# Altium PCB Recv.PcbDoc
Units mm, origin at the board's own origin, x right, y up, seen from the top; angles counter-clockwise.
Board outline 44.64 x 20.07 mm, 2 copper layers (Top Layer, Bottom Layer), stack 1.569 mm thick; 47 components, 29 nets, 139 pads, 515 vias.
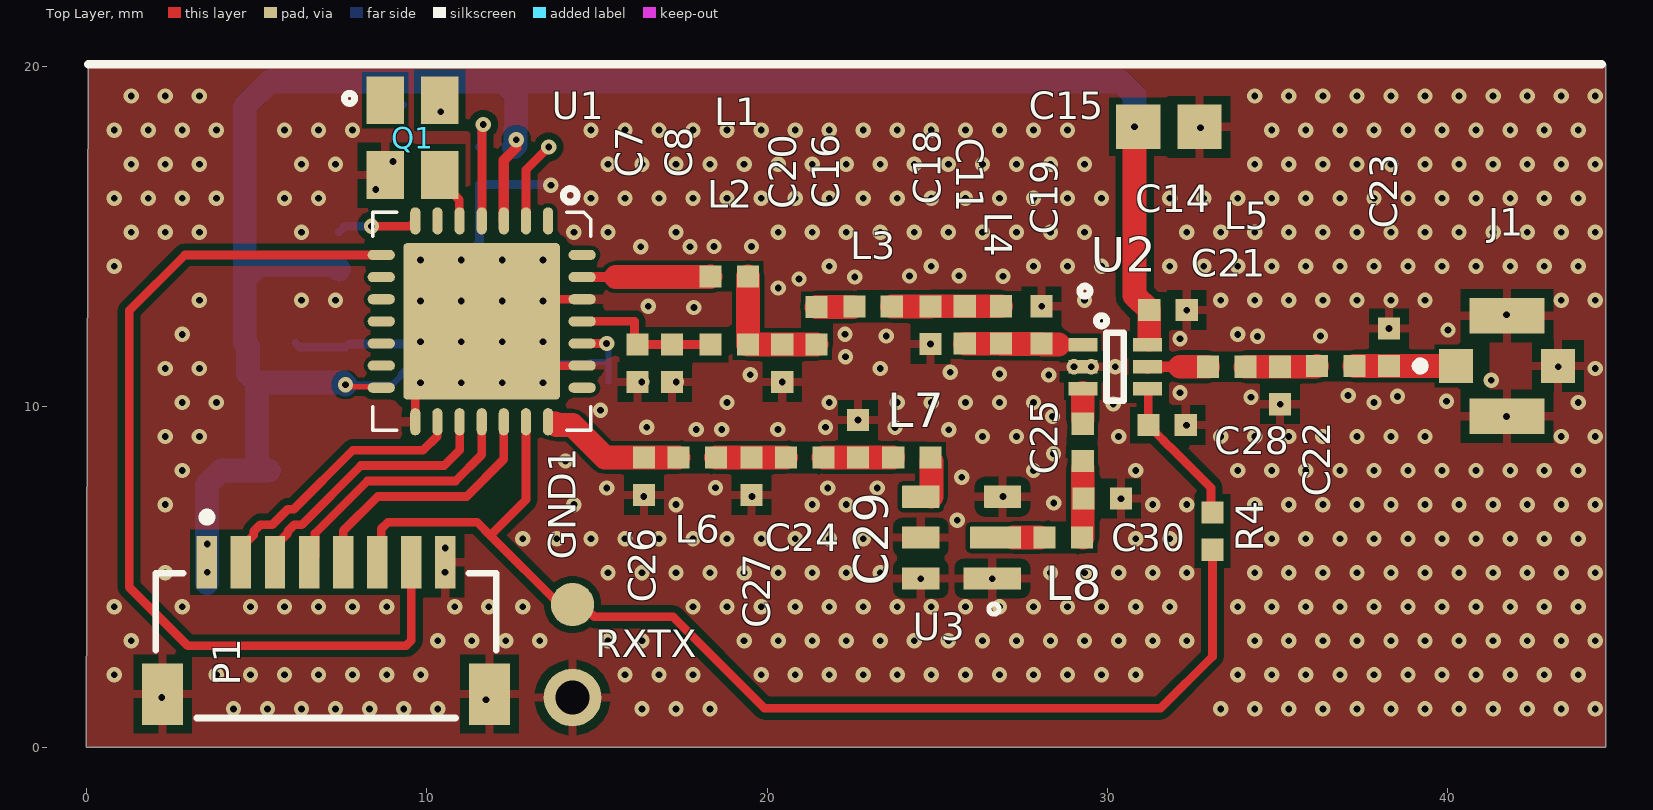
[diagram p0: Top Layer view]
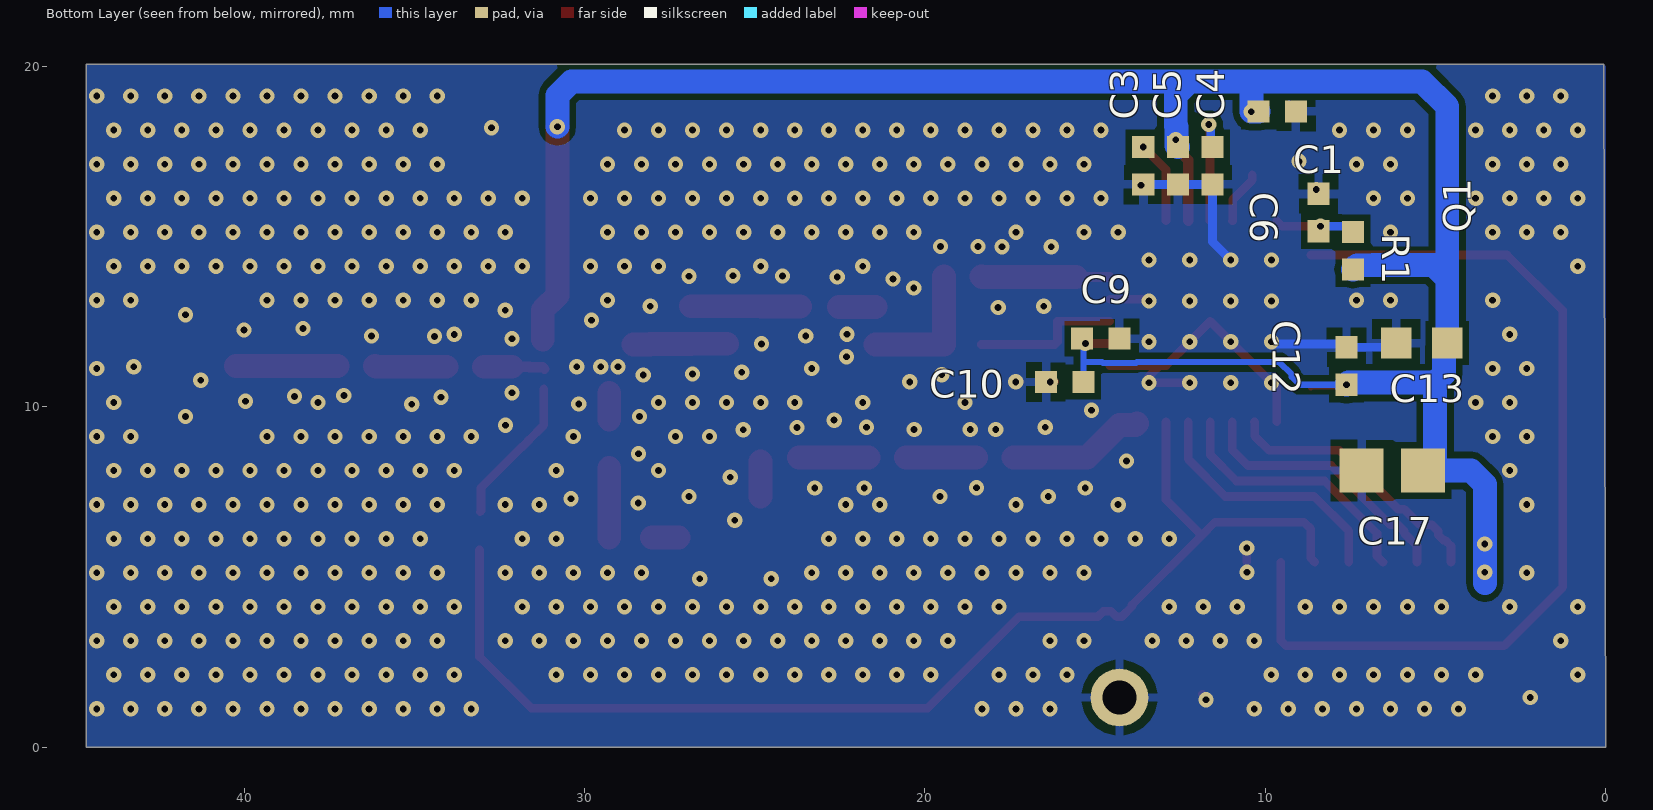
[diagram p1: Bottom Layer view, seen from below]

## Layer stack, top to bottom
Top Solder: solder mask 0.0254, SM-001, Dk 4
Top Layer: signal copper 0.035
Dielectric 1: core 1.4986, Core-043, Dk 4.3
Bottom Layer: signal copper 0.035
Bottom Solder: solder mask 0.0254, SM-001, Dk 4

## Board outline
0,0 0,0.19 0.064,20.066 44.64,20.066 44.64,0

## Design rules (kind name [scope] priority, off if disabled: settings)
Clearance Clearance_5 [InNetClass('RF') vs InNet('NetC28_1')] p1: gap=0.2 ignorepadtopadclearanceinfootprint=TRUE
Clearance Clearance_4 [InNetClass('RF') vs InNet('VDD_RFS')] p2: gap=0.2 ignorepadtopadclearanceinfootprint=TRUE
Clearance Clearance_3 [HasFootprint('vqfn28_6x6mm') vs InNet('VDD_RFS')] p3: gap=0.2 ignorepadtopadclearanceinfootprint=TRUE
Clearance Clearance_2 [((Not InAnyNet) And IsPad) vs InNet('GND')] p4: gap=0.12 ignorepadtopadclearanceinfootprint=FALSE
Clearance [InNetClass('RF') vs InNet('GND')] p5: gap=0.12 ignorepadtopadclearanceinfootprint=TRUE
Clearance Clearance_1 [All] p6: gap=0.2 ignorepadtopadclearanceinfootprint=TRUE
MinimumSolderMaskSliver [All] p1: minsoldermaskwidth=0
PlaneClearance [InNetClass('RF')] p1: clearance=0.12
PolygonConnect PolygonConnect_1 [IsVia vs InNet('GND')] p1: connectstyle=Direct reliefconductorwidth=0.254 reliefentries=4 polygonreliefangle="90 Angle" airgapwidth=0.254
PolygonConnect [All] p2: connectstyle=Relief reliefconductorwidth=0.254 reliefentries=4 polygonreliefangle="90 Angle" airgapwidth=0.254
RoutingVias [All] p1: holewidth=0.198 width=0.45 viastyle="Through Hole" minholewidth=0.198 minwidth=0.45 maxholewidth=0.198 maxwidth=0.45
SilkToSolderMaskClearance [IsPad] p1: minsilkscreentomaskgap=0.175 clearancetoexposedcopper=TRUE
SolderMaskExpansion SolderMaskExpansion_1 [IsVIA] p1: expansion=0.102 istentingtop=TRUE
SolderMaskExpansion [All] p2: expansion=0.102 istentingtop=FALSE
Width Width_1 [InNetClass('RF')] p1: maxlimit=0.7 minlimit=0.3 preferedwidth=0.3
Width Width_2 [InNetClass('POW')] p2: maxlimit=0.7 minlimit=0.15 preferedwidth=0.7
Width [All] p3: maxlimit=0.254 minlimit=0.254 preferedwidth=0.254
27 further rules are at their usual default settings.

## Classes and differential pairs
net class RF: NetC11_1 NetC11_2 NetC16_1 NetC16_2 NetC21_1 NetC21_2 NetC23_2 NetC24_1 NetC24_2 NetC25_1 NetC25_2 NetC26_2 NetL1_2 NetL7_2 NetL8_1
net class POW: VDD_RFS

## Components (designator, comment, footprint, x,y, rotation, side; value= is the part's Value field where it differs from the comment)
C1 "Cap" rlc_402_smd 9.652,18.669 r0 bottom value=10nF
C3 "Cap" rlc_402_smd 13.589,17.081 r90 bottom value=100nF
C4 "Cap" rlc_402_smd 11.557,17.081 r90 bottom value=100nF
C5 "Cap" rlc_402_smd 12.573,17.081 r90 bottom value=100nF
C6 "Cap" rlc_402_smd 8.445,15.706 r90 bottom value=1nF
C7 "Cap" rlc_402_smd 16.192,11.281 r90 top value=10nF
C8 "Cap" rlc_402_smd 17.205,11.282 r90 top value=100pF
C9 "Cap" rlc_402_smd 14.837,12.002 r0 bottom value=100pF
C10 "Cap" rlc_402_smd 15.897,10.731 r180 bottom value=100nF
C11 "Cap" rlc_402_smd 25.808,12.404 r90 top value=1.5pF
C12 "Cap" rlc_402_smd 7.62,11.198 r270 bottom value=100nF
C13 "Cap Semi" rlc_603_smd 5.409,11.874 r180 bottom value=1uF
C14 "Cap" rlc_402_smd 31.779,12.838 r180 top value=1nF
C15 "Cap" rlc_805_smd 31.802,18.224 r180 top value=10uF
C16 "Cap" rlc_402_smd 21.454,12.383 r270 top value=22pF
C17 "Cap" rlc_805_smd 6.275,8.128 r180 bottom value=10uF
C18 "Cap" rlc_402_smd 24.801,12.398 r90 top value=8.2pF
C19 "Cap" rlc_402_smd 28.067,12.404 r270 top value=3.3pF
C20 "Cap" rlc_402_smd 20.447,11.281 r90 top value=8.2pF
C21 "Cap" rlc_402_smd 33.506,11.176 r180 top value=47pF
C22 "Cap" rlc_402_smd 35.073,10.626 r90 top value=NC
C23 "Cap" rlc_402_smd 38.268,11.748 r270 top value=NC
C24 "Cap" rlc_402_smd 21.107,8.509 r180 top value=47pF
C25 "Cap" rlc_402_smd 29.273,8.954 r270 top value=47pF
C26 "NC" rlc_402_smd 16.383,7.959 r90 top
C27 "Cap" rlc_402_smd 19.546,7.959 r90 top value=3.3pF
C28 "Cap" rlc_402_smd 31.75,9.461 r0 top value=1nF
C29 "Cap" rlc_402_smd 22.669,9.059 r270 top value=2.7pF
C30 "Cap" rlc_402_smd 29.845,7.302 r180 top value=2.7pF
GND1 "Test Pin" pin_1mm 14.287,1.46 r90 top
J1 "73412-0110" MOLX-73412-0110_V 41.737,11.198 r270 top
L1 "Inductor" rlc_402_smd 18.892,13.825 r180 top value=2.2nH
L2 "Inductor" rlc_402_smd 18.892,11.832 r180 top value=33nH
L3 "Inductor" rlc_402_smd 23.115,12.948 r0 top value=5.6nH
L4 "Inductor" rlc_402_smd 26.877,12.404 r270 top value=4.7nH
L5 "Inductor" rlc_402_smd 36.702,11.198 r0 top value=0R
L6 "Inductor" rlc_402_smd 17.949,8.509 r0 top value=10nH
L7 "Inductor" rlc_402_smd 24.257,8.509 r0 top value=18nH
L8 "Inductor" rlc_402_smd 28.702,6.159 r0 top value=18nH
P1 "SM08B-SRSS-TB(LF)(SN)" JST-SM08B-SRSS-TB_V 7.048,2.984 r0 top
Q1 "I537" nd3225da 9.588,17.907 r270 top
R1 "Resistor" rlc_402_smd 7.429,14.583 r270 bottom value=100R
R4 "Resistor" rlc_402_smd 33.084,6.35 r90 top value=0R
RXTX "Test Pin" pin_SMD 14.287,4.191 r90 top (schematic designator RXTX_RFMDOD1)
U1 "SX1276" vqfn28_6x6mm 11.62,12.509 r270 top
U2 "RF Switch" SC70-6 30.226,11.176 r0 top value=4259-63
U3 "B3744 868.3MHZ" DCC6C_3.0x3.0mm 25.717,6.159 r180 top

## Footprints (in the part's own frame and the unit in brackets; to place one, negate y for a bottom-side part, rotate by r counter-clockwise, add the part's x,y. Pads: shape width x height; smd on the part's side, far side on the other; paste and mask are expansions set on the pad)
DCC6C_3.0x3.0mm [mm] "DCC6C footprint, 3.0x3.0mm"
  rrect5% 1.7x0.65 smd mask+0.05: 1(-0.9,1.2)
  rrect5% 1.5x0.65 smd mask+0.05: 2(-1,0)
  rrect5% 1.1x0.65 smd mask+0.05: 3(-1.2,-1.2) 4(1.2,-1.2) 5(1.2,0) 6(1.2,1.2)
  silkscreen extent -1.1,1.95 -0.8,2.25, body extent -1.5,-1.5 1.5,1.5, height 1
JST-SM08B-SRSS-TB_V [mm] "SMD, 8-Leads, Body 10x4.25mm, Pitch 1mm"
  rect 0.6x1.55 smd: 1(-3.5,2.45) 2(-2.5,2.45) 3(-1.5,2.45) 4(-0.5,2.45) 5(0.5,2.45) 6(1.5,2.45) 7(2.5,2.45) 8(3.5,2.45)
  rect 1.2x1.8 smd: MP1(-4.8,-1.425) MP2(4.8,-1.425)
  silkscreen extent -5,-2.12 5,3.9, body extent -5,-2.12 5,2.83, height 2.96
MOLX-73412-0110_V [mm] "MCRF, 4-Leads, Body 2.6x2.6mm"
  rect 1x1 smd: 1(0,-1.5) 3(0,1.5)
  rect 1.05x2.2 smd: 2(-1.475,0) 4(1.475,0)
  silkscreen extent -0.12,-2.67 0.12,-2.42, body extent -1.3,-1.3 1.3,1.3, height 1.3
nd3225da [mm] "Crystal SMD 3.2x2.5mm"
  rect 1.4x1.1 smd mask+0.05: 1(-1.1,-0.8) 2(1.1,-0.8) 3(1.1,0.8) 4(-1.1,0.8)
  silkscreen extent -1.3,-2 -1,-1.7, body extent -1.6,-1.25 1.6,1.25, height 1
pin_1mm [mm] "Generic Pin 1.1mm; 1 Lead"
  round 1.7 hole 1 paste+0 mask+0.05: 1(0,0)
pin_SMD [mm] "Generic Pin; 1 pin SMD"
  round 1.27 smd paste-1 mask+0.05: 1(0,0)
rlc_402_smd [mm] "Chip SMD component 402; Body 1.0 x 0.5 mm (LxW typ)"
  rect 0.65x0.65 smd mask+0.05: 1(-0.55,0) 2(0.55,0)
rlc_603_smd [mm] "Chip SMD component 603; Body 1.6 x 0.8mm (LxW typ)"
  rect 0.9x0.9 smd paste+0 mask+0.05: 1(-0.75,0) 2(0.75,0)
rlc_805_smd [mm] "Chip SMD component 805; Body 2.0 x 1.25 mm (LxW typ)"
  rect 1.3x1.3 smd mask+0.05: 1(-0.9,0) 2(0.9,0)
SC70-6 [mm] "SC70 6-Leads, Body 2.0x1.25mm, Pitch 0.65mm"
  rect 0.85x0.4 smd mask+0.05: 1(-0.95,0.65) 2(-0.95,0) 3(-0.95,-0.65) 4(0.95,-0.65) 5(0.95,0) 6(0.95,0.65)
  silkscreen extent -0.55,-1 0.25,1.5, body extent -0.63,-1 0.63,1, height 1.45
vqfn28_6x6mm [mm] "28 Leads, Body 6.0x6.0mm, Pitch 0.65mm, VQFN28"
  oval 0.8x0.3 smd mask+0.05: 1(-2.95,1.95) 2(-2.95,1.3) 3(-2.95,0.65) 4(-2.95,0) 5(-2.95,-0.65) 6(-2.95,-1.3) 7(-2.95,-1.95) 15(2.95,-1.95) 16(2.95,-1.3) 17(2.95,-0.65) 18(2.95,0) 19(2.95,0.65) 20(2.95,1.3) 21(2.95,1.95)
  oval 0.3x0.8 smd mask+0.05: 8(-1.95,-2.95) 9(-1.3,-2.95) 10(-0.65,-2.95) 11(0,-2.95) 12(0.65,-2.95) 13(1.3,-2.95) 14(1.95,-2.95) 22(1.95,2.95) 23(1.3,2.95) 24(0.65,2.95) 25(0,2.95) 26(-0.65,2.95) 27(-1.3,2.95) 28(-1.95,2.95)
  rrect5% 4.6x4.6 smd paste-3.3 mask+0.05: 29(0,0)
  Mechanical 15 keep-out lines w0.1: 3.5,-3.5 -3.5,-3.5 -3.5,3.5 3.5,3.5 3.5,-3.5
  silkscreen extent -3.9,-3.2 3.2,3.2, body extent -3,-3 3,3, height 1

## Part data
C1 C3 C4 C5 C6 C7 C8 C9 C10 C11 C12 C14 C15 C16 C17 C18 C19 C20 C21 C22 C23 C24 C25 C27 C28 C29 C30: "Capacitor SMD", LatestRevisionDate="05-oct-2007  -  Semtech", LatestRevisionNote="Re-released for DXP Platform.", Published=8-Jun-2000, Publisher="Altium Limited"
C13: "Capacitor (Semiconductor SIM Model)", LatestRevisionDate="05-oct-2007  -  Semtech", LatestRevisionNote="Re-released for DXP Platform.", Published=8-Jun-2000, Publisher="Altium Limited"
C26: library part Cap, "Capacitor SMD", LatestRevisionDate="05-oct-2007  -  Semtech", LatestRevisionNote="Re-released for DXP Platform.", Published=8-Jun-2000, Publisher="Altium Limited"
GND1 RXTX: library part test_pin, LatestRevisionDate="05-oct-2007  -  Semtech"
J1: library part CMP-1676-00003-1, "MCRF, PCB Vertical Jack Receptacle, 50 Ohm, 4-Pin SMD, RoHS, Tape and Reel", Frequency="6 Hz", Max Operating Temperature="90 degC", Min Operating Temperature="-40 degC", Package Quantity=5000, Voltage Rating="60 V", ComponentLink1Description="Manufacturer URL", ComponentLink1URL=http://www.molex.com/, ComponentLink2Description=Datasheet, ComponentLink2URL=http://www.molex.com/webdocs/datasheets/pdf/en-us/0734120110_RF_COAX_CONNECTORS.pdf, ComponentLink3Description="Package Specification", ComponentLink3URL=http://www.molex.com/pdm_docs/sd/734120110_sd.pdf, Contact Material=Bronze, Contact Plating=Gold, DatasheetVersion=04/2016, Gender=Female, Height="1.25 mm", Impedance="50 Ohm", Length="3 mm", Mating Cycles=30, Mount="Surface Mount", Mounting Technology="Surface Mount", PackageDescription="4-Leads SMD, Body 2.6 x 2.6 mm", PackageReference=73412-0110, PackageVersion="Rev. C14, 07/2015", Packaging="Tape and Reel", Radiation Hardening=No, REACH SVHC=Unknown, RoHSCompliant=true, Voltage Rating (AC)="60 V", Width="3 mm"
L1 L2 L3 L4 L5 L6 L7 L8: "Inductor SMD", Code_IEC=1005, Code_JEITA=0402, LatestRevisionDate="05-oct-2007  -  Semtech", LatestRevisionNote="Re-released for DXP Platform.", Published=8-Jun-2000, Publisher="Altium Limited"
P1: library part CMP-2000-07082-1, "Male Header, Pitch 1 mm, 1 x 8 Position, Height 2.95 mm, -25 to 85 degC, RoHS, Tape and Reel", Manufacturer=JST, Package Description="Male Header, Pitch 1 mm, 1 x 8 Position, Height 2.95 mm", Package Reference=SM08B-SRSS-TB, Datasheet URL=http://www.jst-mfg.com/product/pdf/eng/eSR.pdf, Datasheet Version=11/2010, Manufacturer URL=http://www.jst.com/home2.html, Mounting Technology=SurfaceMount, No of Positions=8, Pitch=1mm, Style/Orientation=RightAngleHeader/Plug, Termination=Crimp, Type=ShroudedHeader
Q1: library part TCXO, "Termally Compensated External Oscillator"
R1 R4: "Resistor SMD - IEC symbol version", LatestRevisionDate="27-Jul-20  -  Semtech"
U1: "SX1276 - Low Power Integrated UHF Transceiver with loRa Modem", LatestRevisionDate="27-Jul-2009 -  Semtech"
U2: library part "PE4259 RF Switch", "PE4259 Peregrine RF Switch", LatestRevisionDate="03-Sep-2012 -  Semtech"
U3: library part "SAW Filter", "SAW Filter - Bandpass - TEMEX type", LatestRevisionDate="05-oct-2007  -  Semtech"

## Via types
v1: diameter 0.45, hole 0.198, Top Layer to Bottom Layer, tented both sides, 515 vias

## Nets (pads, with @x,y where several pads share a name; then routed paths per layer and width w, separated by ;. In a path a pad name is that pad's centre, name@x,y a point inside that pad or via, vN(x,y) a via of type N, cw(c..) or ccw(c..) an arc to the next point about the centre after c; other vN are vias at no path point)
DIO0: P1.7 U1.8 | length 27.6
  Top Layer w0.254: U1.8 2.903,14.46 1.27,12.827 1.27,4.699 2.984,2.984 9.4,2.984 9.549,3.133 P1.7
GND: C1.1 C3.1 C4.1 C5.1 C6.2 C7.1 C8.1 C9.1 C10.1 C12.1 C13.1 C14.1 C15.1 C17.1 C18.1 C19.1 C20.1 C22.1 C23.1 C26.1 C27.1 C28.2 C29.1 C30.1 GND1.1 J1.2 J1.3 J1.4 P1.8 P1.MP1 P1.MP2 Q1.2 U1.15 U1.23 U1.26 U1.29 U2.2 U3.1 U3.3 U3.5 U3.6 | length 20
  Top Layer w0.254: v1(2.222,1.46) 2.248,1.486 P1.MP1 ; U1.15 9.671,10.56 v1(9.821,10.71) v1(11.021,11.91) U1.29 v1(12.22,11.91) 12.92,11.21 U1.29@13.107,11.21 ; P1.8 v1(10.549,5.853) ; v1(11.747,1.397) 11.747,1.458 P1.MP2 ; v1(12.22,10.71) U1.29@13.42,10.71 ; U1.29@13.42,10.896 U1.29@13.107,11.21 ; v1(13.42,13.109) 13.471,13.16 U1.26 ; U1.23 U1.29@13.107,11.21 ; C7.1 v1(16.319,10.731) ; v1(16.383,7.366) C26.1 ; C8.1 v1(17.335,10.731) ; C27.1 19.558,7.397 v1(19.558,7.366) ; v1(24.517,4.953) U3.6 ; v1(26.613,4.953) 26.618,4.958 U3.1 ; U3.3 26.924,7.366 v1(26.93,7.366) ; C28.2 v1(32.322,9.461) ; v1(32.329,12.838) C14.1@32.34,12.827 ; C15.1 v1(32.734,18.193) ; v1(35.073,10.076) C22.1@35.095,10.076 ; C23.1@38.247,12.319 v1(38.268,12.298) ; v1(41.719,9.716) 41.73,9.716 J1.4 ; v1(41.719,12.7) 41.737,12.683 J1.2 ; J1.3 43.243,11.191 v1(43.243,11.176)
  Bottom Layer w0.254: C13.1 6.286,11.747 C12.1 7.716,11.843 9.754,11.843 v1(9.821,11.91) ; C1.1@9.08,18.669 C1.1 C1.1@9.3,18.867 ; v1(11.021,14.309) 11.557,14.846 C4.1 C5.1 C3.1 13.611,16.51 v1(13.652,16.51)
  other v1: 4.327,1.127 5.327,1.127 6.327,1.127 7.327,1.127 8.327,1.127 9.327,1.127 10.327,1.127 16.327,1.127 17.327,1.127 18.327,1.127 33.328,1.127 34.328,1.127 35.328,1.127 36.328,1.127 37.328,1.127 38.328,1.127 39.328,1.127 40.328,1.127 41.328,1.127 42.328,1.127 43.328,1.127 44.328,1.127 0.827,2.127 3.827,2.127 4.827,2.127 5.827,2.127 6.827,2.127 7.827,2.127 8.827,2.127 9.827,2.127 15.827,2.127 16.828,2.127 17.828,2.127 19.828,2.127 20.828,2.127 21.828,2.127 22.828,2.127 23.828,2.127 24.828,2.127 25.828,2.127 26.828,2.127 27.828,2.127 28.828,2.127 29.828,2.127 30.828,2.127 33.828,2.127 34.828,2.127 35.828,2.127 36.828,2.127 37.828,2.127 38.828,2.127 39.828,2.127 40.828,2.127 41.828,2.127 42.828,2.127 43.828,2.127 1.327,3.127 10.327,3.127 11.327,3.127 12.327,3.127 13.327,3.127 15.327,3.127 16.327,3.127 19.328,3.127 20.328,3.127 21.328,3.127 22.328,3.127 23.328,3.127 24.328,3.127 25.328,3.127 26.328,3.127 27.328,3.127 28.328,3.127 29.328,3.127 30.328,3.127 31.328,3.127 32.328,3.127 34.328,3.127 35.328,3.127 36.328,3.127 37.328,3.127 38.328,3.127 39.328,3.127 40.328,3.127 41.328,3.127 42.328,3.127 43.328,3.127 44.328,3.127 0.827,4.127 2.827,4.127 4.827,4.127 5.827,4.127 6.827,4.127 7.827,4.127 8.827,4.127 10.827,4.127 11.827,4.127 12.827,4.127 17.828,4.127 18.828,4.127 19.828,4.127 20.828,4.127 21.828,4.127 22.828,4.127 23.828,4.127 24.828,4.127 25.828,4.127 26.828,4.127 27.828,4.127 28.828,4.127 29.828,4.127 30.828,4.127 31.828,4.127 33.828,4.127 34.828,4.127 35.828,4.127 36.828,4.127 37.828,4.127 38.828,4.127 39.828,4.127 40.828,4.127 41.828,4.127 42.828,4.127 43.828,4.127 2.327,5.127 15.327,5.127 16.327,5.127 17.327,5.127 18.327,5.127 19.328,5.127 20.328,5.127 21.328,5.127 22.328,5.127 23.328,5.127 28.328,5.127 29.328,5.127 30.328,5.127 31.328,5.127 32.328,5.127 34.328,5.127 35.328,5.127 36.328,5.127 37.328,5.127 38.328,5.127 39.328,5.127 40.328,5.127 41.328,5.127 42.328,5.127 43.328,5.127 44.328,5.127 10.541,5.143 12.827,6.127 13.827,6.127 14.827,6.127 15.827,6.127 16.828,6.127 17.828,6.127 18.828,6.127 19.828,6.127 20.828,6.127 21.828,6.127 22.828,6.127 30.828,6.127 31.828,6.127 34.828,6.127 35.828,6.127 36.828,6.127 37.828,6.127 38.828,6.127 39.828,6.127 40.828,6.127 41.828,6.127 42.828,6.127 43.828,6.127 25.59,6.667 2.327,7.127 14.327,7.127 17.327,7.127 21.328,7.127 22.328,7.127 31.328,7.127 32.328,7.127 34.328,7.127 35.328,7.127 36.328,7.127 37.328,7.127 38.328,7.127 39.328,7.127 40.328,7.127 41.328,7.127 42.328,7.127 43.328,7.127 44.328,7.127 28.42,7.175 30.395,7.302 15.296,7.617 18.489,7.619 21.785,7.617 23.234,7.617 25.72,7.93 2.827,8.127 27.828,8.127 30.828,8.127 33.828,8.127 34.828,8.127 35.828,8.127 36.828,8.127 37.828,8.127 38.828,8.127 39.828,8.127 40.828,8.127 41.828,8.127 42.828,8.127 43.828,8.127 14.081,8.407 28.413,8.624 2.327,9.127 3.327,9.127 26.328,9.127 27.328,9.127 30.328,9.127 33.328,9.127 34.328,9.127 35.328,9.127 36.328,9.127 37.328,9.127 38.328,9.127 39.328,9.127 43.328,9.127 44.328,9.127 17.919,9.33 18.669,9.335 20.32,9.335 25.337,9.328 21.717,9.398 23.759,9.391 16.471,9.401 22.669,9.609 28.384,9.716 15.11,9.9 30.168,10.08 2.827,10.127 3.827,10.127 18.828,10.127 21.828,10.127 23.828,10.127 24.828,10.127 25.828,10.127 26.828,10.127 27.828,10.127 37.828,10.127 43.828,10.127 39.96,10.162 34.216,10.284 38.518,10.306 37.069,10.332 32.131,10.414 11.021,10.71 13.42,10.71 20.447,10.731 41.272,10.78 19.51,10.94 28.279,10.934 26.83,10.962 25.381,11.014 2.327,11.127 3.327,11.127 23.328,11.127 44.328,11.127 29.019,11.176 29.527,11.176 30.226,11.176 22.307,11.473 24.801,11.848 13.42,11.91 32.131,12.002 23.506,12.077 34.405,12.068 36.256,12.079 2.827,12.127 22.288,12.128 33.828,12.127 40.005,12.255 29.796,12.542 17.853,12.918 16.51,12.954 28.067,12.954 3.327,13.127 6.327,13.127 7.327,13.127 9.821,13.109 11.021,13.109 12.22,13.109 29.328,13.127 33.328,13.127 34.328,13.127 35.328,13.127 36.328,13.127 37.328,13.127 38.328,13.127 39.328,13.127 43.328,13.127 44.328,13.127 20.333,13.489 20.938,13.754 22.574,13.814 24.188,13.839 26.929,13.836 25.638,13.846 0.827,14.127 21.828,14.127 24.828,14.127 27.828,14.127 28.828,14.127 29.828,14.127 31.828,14.127 32.828,14.127 33.828,14.127 34.828,14.127 35.828,14.127 36.828,14.127 37.828,14.127 38.828,14.127 39.828,14.127 40.828,14.127 41.828,14.127 42.828,14.127 43.828,14.127 9.821,14.309 12.22,14.309 13.42,14.309 16.288,14.701 17.738,14.701 18.446,14.706 19.546,14.706 1.327,15.127 2.327,15.127 3.327,15.127 6.327,15.127 14.327,15.127 15.327,15.127 17.327,15.127 20.328,15.127 21.328,15.127 22.328,15.127 23.328,15.127 24.328,15.127 25.328,15.127 26.328,15.127 27.328,15.127 28.328,15.127 29.328,15.127 32.328,15.127 33.328,15.127 34.328,15.127 35.328,15.127 36.328,15.127 37.328,15.127 38.328,15.127 39.328,15.127 40.328,15.127 41.328,15.127 42.328,15.127 43.328,15.127 44.328,15.127 0.827,16.127 1.827,16.127 2.827,16.127 3.827,16.127 5.827,16.127 6.827,16.127 14.827,16.127 15.827,16.127 16.828,16.127 17.828,16.127 18.828,16.127 19.828,16.127 20.828,16.127 21.828,16.127 22.828,16.127 23.828,16.127 24.828,16.127 25.828,16.127 26.828,16.127 27.828,16.127 28.828,16.127 29.828,16.127 31.828,16.127 32.828,16.127 33.828,16.127 34.828,16.127 35.828,16.127 36.828,16.127 37.828,16.127 38.828,16.127 39.828,16.127 40.828,16.127 41.828,16.127 42.828,16.127 43.828,16.127 8.509,16.383 1.327,17.127 2.327,17.127 3.327,17.127 6.327,17.127 7.327,17.127 15.327,17.127 16.327,17.127 17.327,17.127 18.327,17.127 19.328,17.127 20.328,17.127 21.328,17.127 22.328,17.127 23.328,17.127 24.328,17.127 25.328,17.127 26.328,17.127 27.328,17.127 28.328,17.127 29.328,17.127 34.328,17.127 35.328,17.127 36.328,17.127 37.328,17.127 38.328,17.127 39.328,17.127 40.328,17.127 41.328,17.127 42.328,17.127 43.328,17.127 44.328,17.127 9.017,17.209 0.827,18.127 1.827,18.127 2.827,18.127 3.827,18.127 5.827,18.127 6.827,18.127 7.827,18.127 14.827,18.127 15.827,18.127 16.828,18.127 17.828,18.127 18.828,18.127 19.828,18.127 20.828,18.127 21.828,18.127 22.828,18.127 23.828,18.127 24.828,18.127 25.828,18.127 26.828,18.127 27.828,18.127 28.828,18.127 34.828,18.127 35.828,18.127 36.828,18.127 37.828,18.127 38.828,18.127 39.828,18.127 40.828,18.127 41.828,18.127 42.828,18.127 43.828,18.127 1.327,19.127 2.327,19.127 3.327,19.127 34.328,19.127 35.328,19.127 36.328,19.127 37.328,19.127 38.328,19.127 39.328,19.127 40.328,19.127 41.328,19.127 42.328,19.127 43.328,19.127 44.328,19.127
MISO: P1.3 U1.17 | length 7.9
  Top Layer w0.254: P1.3 5.549,5.91 5.921,6.282 5.921,6.345 6.113,6.536 6.339,6.536 8.076,8.274 10.521,8.274 10.971,8.724 U1.17
MOSI: P1.4 U1.18 | length 7.7
  Top Layer w0.254: P1.4 6.721,5.607 6.721,6.277 8.264,7.82 10.85,7.82 11.62,8.59 U1.18
NetC3_2: C3.2 U1.2 | length 2.4
  Top Layer w0.254: U1.2 12.92,16.963 v1(13.589,17.631)
NetC4_2: C4.2 U1.4 | length 3.6
  Top Layer w0.254: U1.4 11.629,15.468 11.629,18.252 v1(11.666,18.289)
  Bottom Layer w0.254: C4.2 11.612,17.686 11.612,18.235 v1(11.666,18.289)
NetC6_1: C6.1 R1.1 U1.7 | length 2.4
  Top Layer w0.254: v1(8.382,15.303) 9.515,15.303 U1.7
  Bottom Layer w0.254: R1.1 7.6,15.303 v1(8.382,15.303)
NetC7_2: C7.2 C8.2 L2.2 U1.25 | length 4.4
  Top Layer w0.254: U1.25 16.107,12.509 16.107,11.917 C7.2 C8.2 L2.2
NetC11_1: C11.1 C19.2 L4.2 U2.1 | length 2.8
  Top Layer w0.7: C11.1 L4.2 26.883,11.848 28.061,11.848 C19.2 28.095,11.826 28.566,11.826
NetC11_2: C11.2 C18.2 L3.2 L4.1 | length 3.2
  Top Layer w0.7: L3.2 C18.2 24.807,12.954 C11.2 L4.1
NetC16_1: C16.1 L3.1 | length 1.1
  Top Layer w0.7: C16.1 L3.1@22.522,12.932
NetC16_2: C16.2 C20.2 L1.1 L2.1 | length 4
  Top Layer w0.7: L1.1 L2.1 C20.2 C20.2 C16.2
NetC21_1: C21.1 C22.2 L5.1 | length 2.1
  Top Layer w0.7: C21.1 C22.2 36.131,11.176 L5.1
NetC21_2: C21.2 U2.5 | length 1.8
  Top Layer w0.3: U2.5@31.176,11.112 31.226,11.162 31.613,11.162 31.627,11.176 32.131,11.176
  Top Layer w0.7: 32.131,11.176 C21.2
NetC23_2: C23.2 J1.1 L5.2 | length 3
  Top Layer w0.7: L5.2 C23.2 J1.1
NetC24_1: C24.1 C29.2 L7.1 | length 2
  Top Layer w0.7: C24.1 L7.1
NetC24_2: C24.2 C27.2 L6.2 | length 2.1
  Top Layer w0.7: L6.2 C27.2 C24.2
NetC25_1: C25.1 U2.3 | length 0.8
  Top Layer w0.7: C25.1@29.273,9.63 U2.3@29.273,10.414
NetC25_2: C25.2 C30.2 L8.2 | length 2
  Top Layer w0.7: L8.2@29.273,6.159 C25.2@29.273,8.202
NetC26_2: C26.2 L6.1 U1.21 | length 4
  Top Layer w0.7: 13.771,9.51 13.819,9.461 14.288,9.461 15.24,8.509 C26.2 L6.1
NetC28_1: C28.1 R4.2 U2.4 | length 4.4
  Top Layer w0.254: U2.4@31.2,10.526 C28.1 31.648,9.014 31.648,9.001 31.84,8.809 31.852,8.809 33.042,7.62 33.042,6.942 R4.2@33.063,6.921
NetL1_2: L1.2 U1.27 | length 3.5
  Top Layer w0.3: U1.27 15.24,13.809
  Top Layer w0.7: 15.557,13.809 18.326,13.809 L1.2
NetL7_2: L7.2 U3.4 | length 1
  Top Layer w0.7: U3.4@24.828,7.366 L7.2@24.828,8.393
NetL8_1: L8.1 U3.2 | length 0.8
  Top Layer w0.7: U3.2@27.231,6.159 L8.1@28.014,6.159
NetQ1_3: Q1.3 U1.5 | length 1.6
  Top Layer w0.254: Q1.3 10.389,16.657 10.962,16.084 10.962,15.468 U1.5
NSS: P1.5 U1.19 | length 7.6
  Top Layer w0.254: P1.5 7.556,5.443 7.556,6.359 8.563,7.366 11.18,7.366 12.271,8.457 U1.19
RXTX: P1.6 R4.1 RXTX.1 U1.20 | length 35.5
  Top Layer w0.254: P1.6 8.673,5.559 8.673,6.416 8.861,6.604 11.493,6.604 11.874,6.223 13.918,4.179 13.918,4.137 14.224,3.831 14.373,3.831 14.538,3.997 14.757,3.997 14.922,3.831 17.24,3.831 19.777,1.294 19.777,1.292 19.926,1.143 31.559,1.143 33.084,2.667 R4.1 ; 11.888,6.237 12.92,7.269 U1.20
SCK: P1.2 U1.16 | length 8.1
  Top Layer w0.254: P1.2 4.548,5.91 4.721,6.082 4.773,6.082 4.922,6.231 4.922,6.345 5.113,6.536 5.471,6.536 5.925,6.99 6.101,6.99 7.839,8.728 9.905,8.728 10.312,9.135 10.312,9.551 U1.16
VDD_RFS: C1.2 C5.2 C9.2 C10.2 C12.2 C13.2 C14.2 C15.2 C17.2 P1.1 Q1.4 R1.2 U1.3 U1.14 U1.24 U2.6 | length 72.2
  Top Layer w0.15: v1(7.62,10.648) 7.679,10.588 8.642,10.588 U1.14
  Top Layer w0.254: U1.24 v1(15.288,11.859)
  Top Layer w0.3: U1.3 12.271,17.241 12.636,17.607 v1(12.636,17.843)
  Top Layer w0.7: v1(30.797,18.224) 30.797,13.269 C14.2 U2.6@31.229,11.98
  Bottom Layer w0.15: C9.2 C9.2
  Bottom Layer w0.18: v1(7.62,10.648) 8.997,10.648 9.231,10.882 9.231,10.954 9.589,11.312 13.775,11.312 13.801,11.287 14.774,11.287 14.8,11.312 15.334,11.312 15.347,11.299 ; C10.2 15.347,11.299 ; C9.2@15.347,12.002 15.347,11.299
  Bottom Layer w0.7: 3.556,4.826 v1(3.556,5.143) v1(3.556,5.969) 3.556,7.718 3.966,8.128 C17.2@5.016,8.128 ; C17.2 C17.2@5.016,8.128 ; R1.2 7.305,14.158 6.835,14.158 6.833,14.16 5.07,14.16 4.659,13.75 ; v1(7.62,10.648) 7.558,10.71 5.016,10.71 ; C1.2 v1(10.414,18.669) 10.414,19.494 10.477,19.558 ; C5.2 12.614,17.672 12.614,18.226 12.636,18.248 12.636,19.148 12.226,19.558 ; v1(30.797,18.224) 30.797,19.148 30.387,19.558 12.226,19.558 ; 4.659,13.75 4.659,18.82 5.397,19.558 10.477,19.558 ; 4.659,13.75 C13.2 4.759,11.775 4.759,10.967 5.016,10.71 ; C17.2@5.016,8.128 5.016,10.71 ; 10.477,19.558 12.226,19.558
pads on no net: Q1.1 U1.1 U1.6 U1.9 U1.10 U1.11 U1.12 U1.13 U1.22 U1.28

## Polygon pours and split planes (outlines as drawn)
GND on Bottom Layer "GND_L02_P001" (solid, remove dead copper, pour order 1): 0,0 0,20.003 0.063,20.066 44.641,20.066 44.641,0
GND on Top Layer "GND_L01_P000" (solid, remove dead copper, pour order 0): 0.063,20.066 44.641,20.066 44.641,0 0,0

## Other copper
Top Layer:
  pour cut-out: 28.768,8.5 29.638,8.5 29.696,8.442 29.696,9.424 28.867,9.424 28.829,9.461
  pour cut-out: 28.197,5.706 29.067,5.706 29.125,5.648 29.125,6.63 28.295,6.63 28.258,6.667
  pour cut-out: 23.745,8.055 24.615,8.055 24.673,7.997 24.673,8.979 23.843,8.979 23.805,9.017
  pour cut-out: 20.595,8.055 21.465,8.055 21.523,7.997 21.523,8.979 20.693,8.979 20.655,9.017
  pour cut-out: 17.437,8.055 18.307,8.055 18.365,7.997 18.365,8.979 17.535,8.979 17.497,9.017
  pour cut-out: 21.009,12.761 21.009,11.891 20.951,11.833 21.933,11.833 21.933,12.662 21.971,12.7
  pour cut-out: 18.513,14.27 19.27,14.27 19.27,13.555 19.095,13.38 18.529,13.38
  pour cut-out: 22.618,13.393 22.653,13.427 23.665,13.427 23.665,12.468 23.644,12.49 22.705,12.49
  pour cut-out: 27.049,13.399 27.05,13.399 27.749,13.399 27.749,12.763 27.622,12.636 27.051,12.636
  pour cut-out: 25.336,12.7 27.559,12.7 27.622,12.636 27.622,12.002 25.4,12.002 25.336,11.938
  pour cut-out: 33.128,11.621 33.885,11.621 33.885,10.731 33.128,10.731
  pour cut-out: 36.324,11.643 37.08,11.643 37.08,10.753 36.343,10.753
  pour cut-out: 40.767,12.065 40.767,10.351 41.212,10.351 41.212,12.002 41.148,12.065

## Silkscreen, mask and mechanical layers (free items; w line width, h text height)
Top Overlay:
  circle w0.2: c29.337,13.399 r0.15
  lines w0.254: 0.064,20.066 44.514,20.066